# EAGLE board daGloane_panel (EAGLE 6.2), part 1 of 5
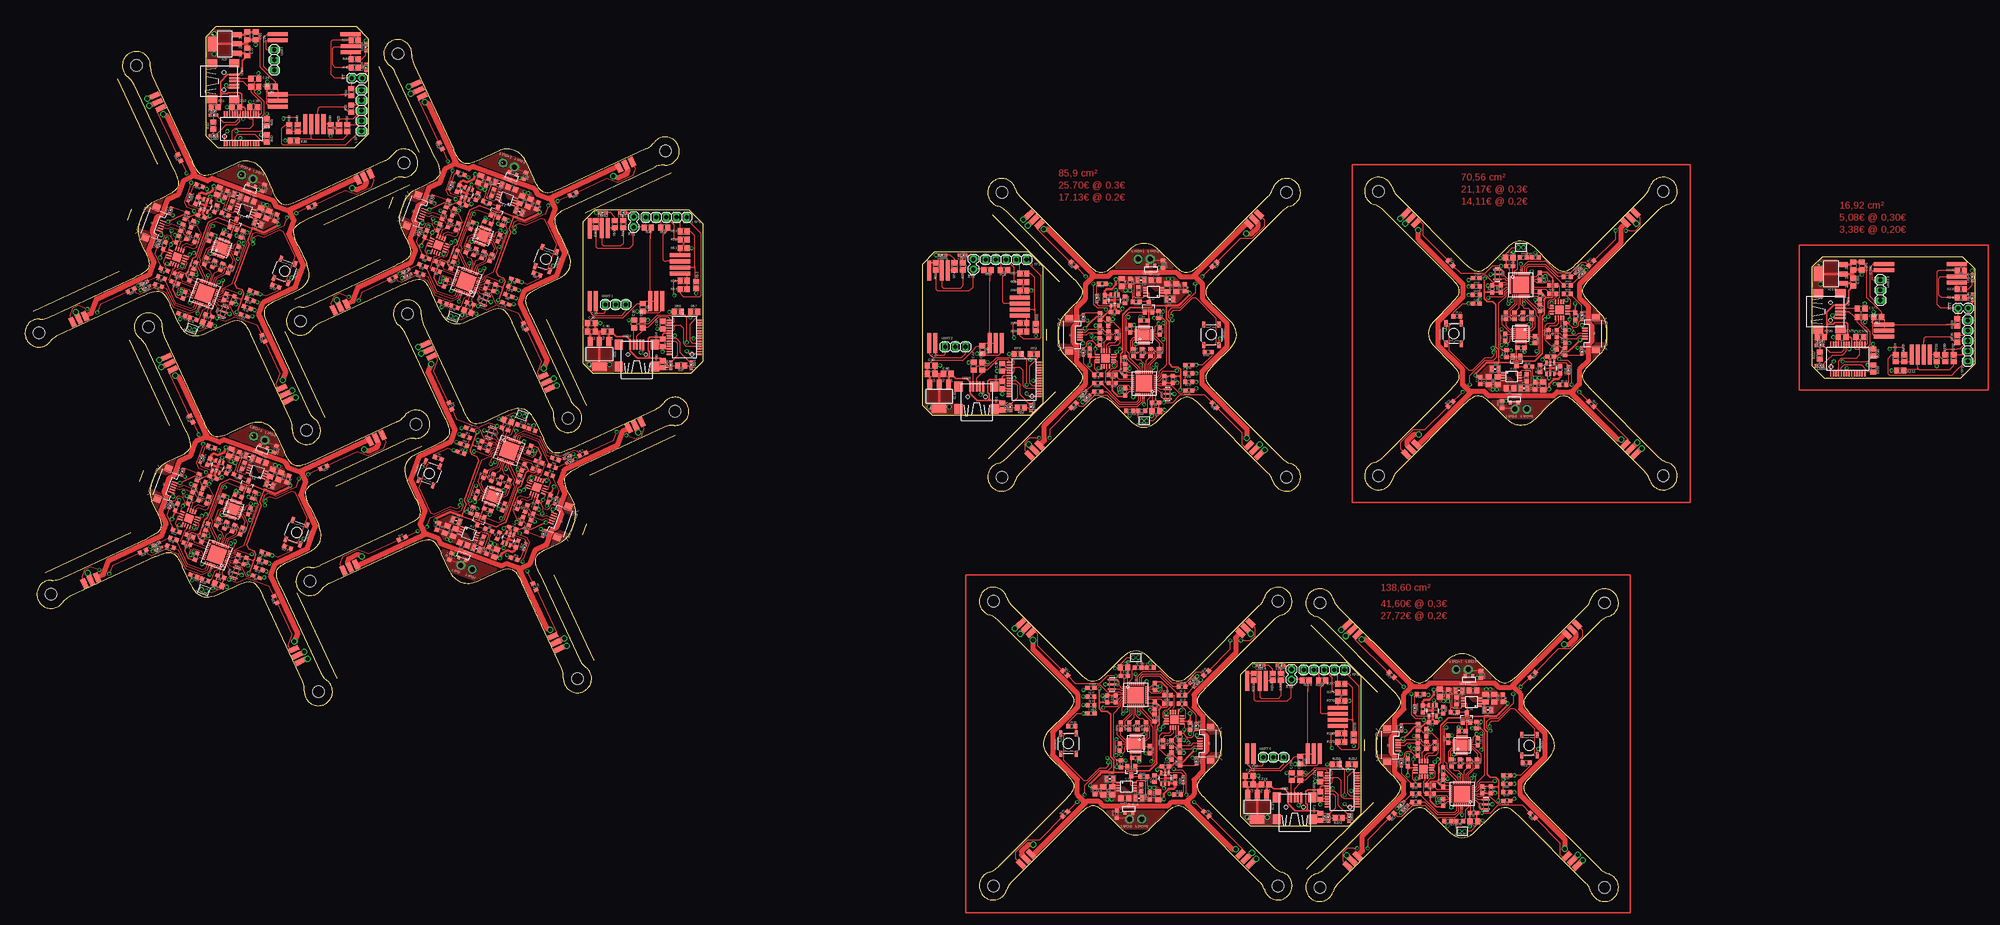
[diagram p0: board, top side]
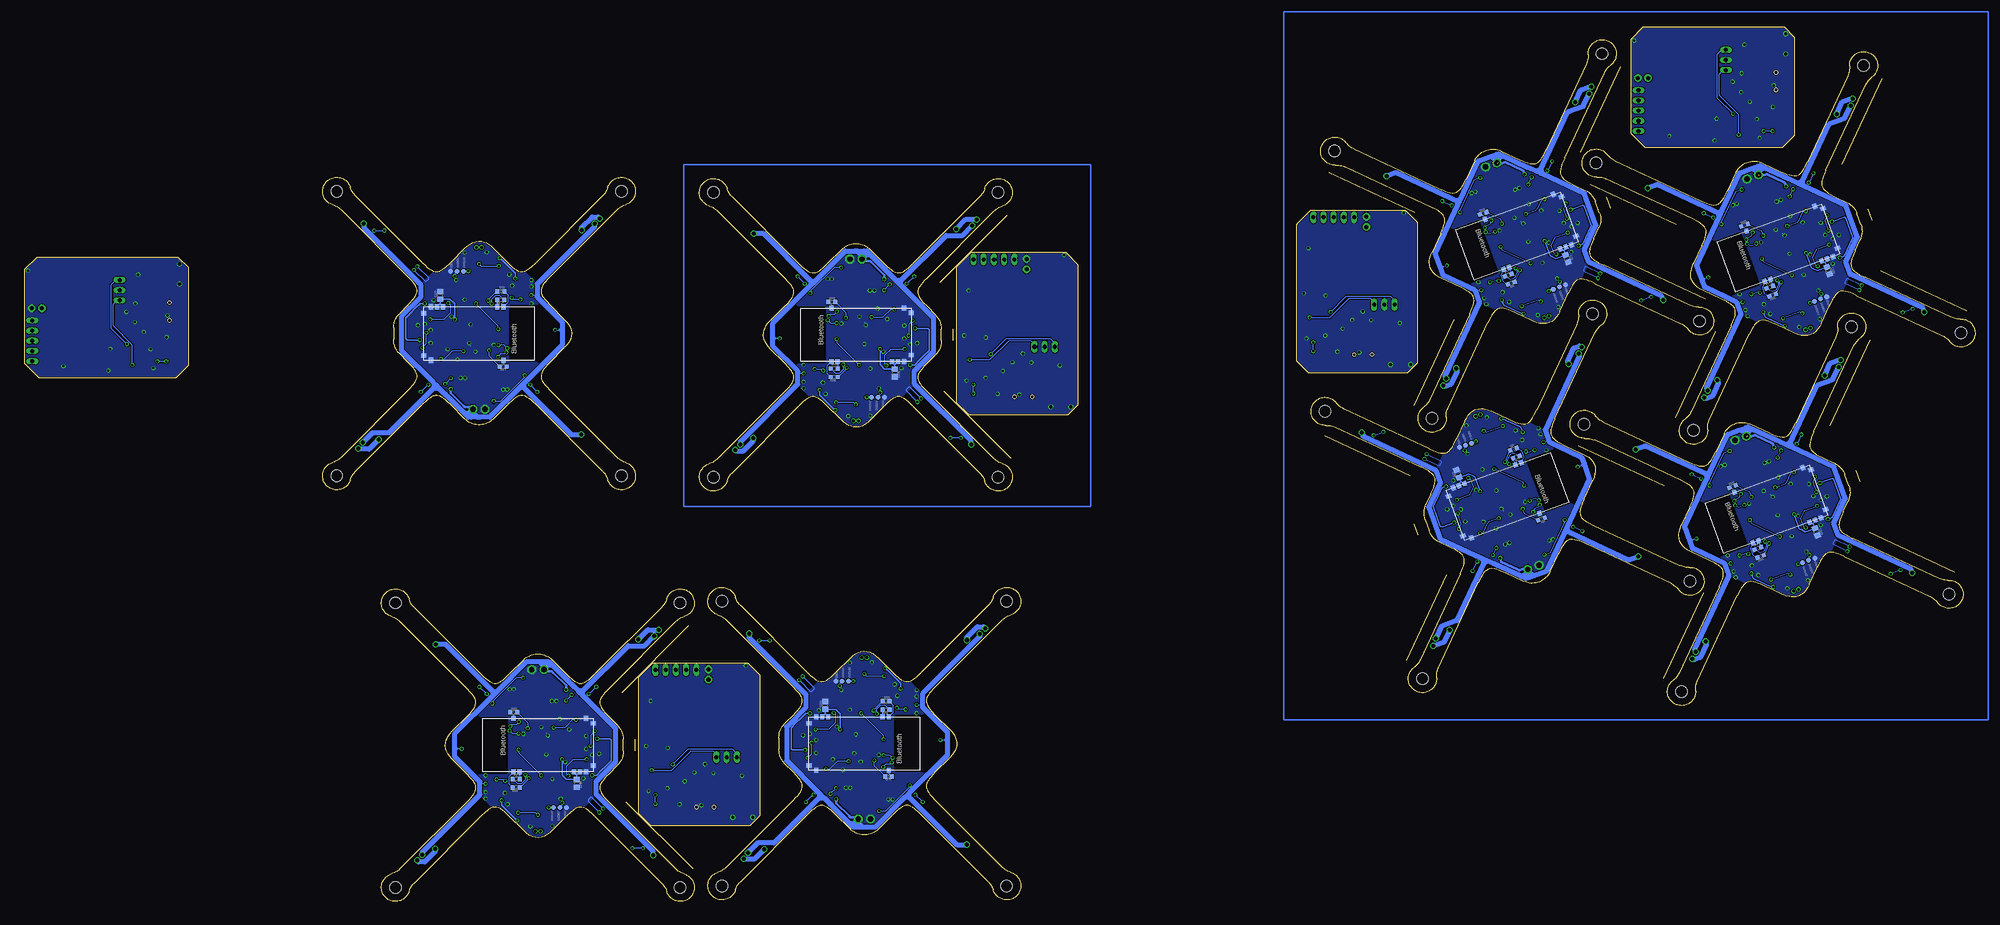
[diagram p1: board, bottom side, seen from below]

Size 484.41 x 217.35 mm. Coordinates in mm from the lower left corner, seen from the top.
Outline: 1488 segments
Copper layers (1*16): Top 0.035mm / dielectric 1.5mm / Bottom 0.035mm
Design rules: minimum track width 0.15mm, minimum drill 0.3mm, track to track 0.15mm, track to pad 0.15mm, pad to pad 0.15mm, via to via 0.15mm, smd to smd 0mil, copper to edge 0.2mm, drill to drill 0.2mm, minimum pad ring 0.2mm, minimum via ring 0.2mm, stop-mask expansion 4mil, vias tented up to drill 0.8mm, thermal gap 0.15mm
Holes 2.9 mm at 70.82,79.57 137.27,55.39 161.45,121.83 95.01,146.02 159.06,186.52 92.62,210.71 68.43,144.26 134.88,120.08 97.1,118.62 30.66,142.8 6.47,76.36 72.92,52.17 94.13,183.55 27.68,207.74 3.5,141.29 69.95,117.11 313.37,176.21 242.66,176.21 242.66,105.5 313.37,105.5 336.26,105.8 406.97,105.8 406.97,176.51 336.26,176.51 240.56,3.9 311.27,3.9 311.27,74.61 240.56,74.61 392.37,74.21 321.66,74.21 321.66,3.5 392.37,3.5
bRestrict: area 100.1,97.1 to 111.2,112; area 118.7,154.1 to 129.8,169; area 56.7,86.2 to 67.9,101.1; area 53.8,151.1 to 64.9,166; area 285.7,134.2 to 292.7,147.5; area 356.9,134.6 to 363.9,147.9; area 261.2,32.7 to 268.2,46; area 364.7,32.2 to 371.7,45.5

## Footprints (pad centres in the part's own frame; a part is rotated, then mirrored left to right if it is on the bottom)
1X02 = drill 1.016 pad 1.88: 1 0,0; 2 2.54,0
1X02_50MIL = drill 0.7 pad 1.1: 1 -0.635,0; 2 0.635,0
C0603 = smd 1.1 x 1: 1 -0.85,0; 2 0.85,0
C0805 = smd 1.3 x 1.5: 1 -0.95,0; 2 0.95,0
SOT23 = smd 1 x 1.4: 1 -0.95,-1.1; 2 0.95,-1.1; 3 0,1.1
TESTPAD_B1,27 = smd 1.27 x 1.27: PP 0,0
MSOP8 = smd 0.35 x 1: 1 -0.975,-2.05; 2 -0.325,-2.05; 3 0.325,-2.05; 4 0.975,-2.05; 5 0.975,2.05; 6 0.325,2.05; 7 -0.325,2.05; 8 -0.975,2.05
SSOP28DB = smd 0.348 x 1.397: 1 -4.225,-3.656; 2 -3.575,-3.656; 3 -2.925,-3.656; 4 -2.275,-3.656; 5 -1.625,-3.656; 6 -0.975,-3.656; 7 -0.325,-3.656; 8 0.325,-3.656; 9 0.975,-3.656; 10 1.625,-3.656; 11 2.275,-3.656; 12 2.925,-3.656; 13 3.575,-3.656; 14 4.225,-3.656; 15 4.225,3.656; 16 3.575,3.656; 17 2.925,3.656; 18 2.275,3.656; 19 1.625,3.656; 20 0.975,3.656; 21 0.325,3.656; 22 -0.325,3.656; 23 -0.975,3.656; 24 -1.625,3.656; 25 -2.275,3.656; 26 -2.925,3.656; 27 -3.575,3.656; 28 -4.225,3.656
SOT223 = smd 1.219 x 2.235: 1 -2.311,-3.099; 2 0,-3.099; 3 2.311,-3.099 | smd 3.6 x 2.2: 4 0,3.099
WUERTH-ELEKTRONIK_WE-KI_0805_B = smd 1.02 x 1.78: 1 -0.89,0; 2 0.89,0
CHIPLED_0603 = smd 0.8 x 0.8: A 0,-0.75; C 0,0.75
P1-13 = drill 1.321 pad 2.159 octagon: TP 0,0
1X05 = drill 1.016 long: 1 -5.08,0; 2 -2.54,0; 3 0,0; 4 2.54,0; 5 5.08,0
TACTILE_SWITCH_SMD = smd 1.524 x 0.762: 1 -2.54,1.905; 2 2.54,1.905; 3 -2.54,-1.905; 4 2.54,-1.905
R0603 = smd 1 x 1.1: 1 -0.85,0; 2 0.85,0
R0805 = smd 1.3 x 1.5: 1 -0.85,0; 2 0.85,0
VFQFPN36 = smd 0.75 x 0.3: 1 -2.775,2; 2 -2.775,1.5; 3 -2.775,1; 4 -2.775,0.5; 5 -2.775,0; 6 -2.775,-0.5; 7 -2.775,-1; 8 -2.775,-1.5; 9 -2.775,-2; 19 2.775,-2; 20 2.775,-1.5; 21 2.775,-1; 22 2.775,-0.5; 23 2.775,0; 24 2.775,0.5; 25 2.775,1; 26 2.775,1.5; 27 2.775,2 | smd 0.3 x 0.75: 10 -2,-2.775; 11 -1.5,-2.775; 12 -1,-2.775; 13 -0.5,-2.775; 14 0,-2.775; 15 0.5,-2.775; 16 1,-2.775; 17 1.5,-2.775; 18 2,-2.775; 28 2,2.775; 29 1.5,2.775; 30 1,2.775; 31 0.5,2.775; 32 0,2.775; 33 -0.5,2.775; 34 -1,2.775; 35 -1.5,2.775; 36 -2,2.775 | smd 4.1 x 4.1: TP 0,0
MURATA-FILTER_CSTCE__G = smd 0.4 x 2: 1 -1.2,0; 2 0,0; 3 1.2,0
SPARKFUN_SOT23-5 = smd 0.55 x 1.2: 1 -0.95,-1.3; 2 0,-1.3; 3 0.95,-1.3; 4 0.95,1.3; 5 -0.95,1.3
MPU6000 = smd 0.8 x 0.35: 1 -2,1.25; 2 -2,0.75; 3 -2,0.25; 4 -2,-0.25; 5 -2,-0.75; 6 -2,-1.25; 13 2,-1.25; 14 2,-0.75; 15 2,-0.25; 16 2,0.25; 17 2,0.75; 18 2,1.25 | smd 0.35 x 0.85: 7 -1.25,-1.925; 8 -0.75,-1.925; 9 -0.25,-1.925; 10 0.25,-1.925; 11 0.75,-1.925; 12 1.25,-1.925; 19 1.25,1.925; 20 0.75,1.925; 21 0.25,1.925; 22 -0.25,1.925; 23 -0.75,1.925; 24 -1.25,1.925 | smd 2.7 x 2.6: 25 0,0
SERIAL_QFN4X4-16 = smd 1.1 x 0.35: 1 -1.95,0.975; 2 -1.95,0.325; 3 -1.95,-0.325; 4 -1.95,-0.975; 9 1.95,-0.975; 10 1.95,-0.325; 11 1.95,0.325; 12 1.95,0.975 | smd 0.35 x 1.1: 5 -0.975,-1.95; 6 -0.325,-1.95; 7 0.325,-1.95; 8 0.975,-1.95; 13 0.975,1.95; 14 0.325,1.95; 15 -0.325,1.95; 16 -0.975,1.95 | smd 2.1 x 2.1: C 0,0
BLUETOOTH_REDUCED = smd 1.3 x 1.05: P$1 -6.65,6.04; P$2 -6.65,4.54; P$11 -6.65,-8.96; P$12 -6.65,-10.46; P$13 -6.65,-11.96; P$22 6.65,-11.96; P$34 6.65,6.04 | smd 1.05 x 1.3: P$14 -5.05,-13.75; P$21 5.45,-13.75
3A_BLDC_CONTROLLER = smd 2.45 x 1.25: 1 1.05,1.75; 2 1.05,0; 3 1.05,-1.75
MICRO3(SOT-23) = smd 0.802 x 0.972: 1 -0.95,-0.885; 2 0.95,-0.885; 3 0,0.885
SPRING_HEADER = smd 5 x 1: P$1 0,0
1X03 = drill 1.016 long: 1 -2.54,0; 2 0,0; 3 2.54,0
USB-MP-S2 = smd 2.5 x 0.5: D+ 2.487,0.005; D- 2.487,0.805; GND 2.487,-1.595; ID 2.487,-0.795; VBUS 2.487,1.605 | smd 2.5 x 2: P$1 -3.013,-4.495; P$2 -3.013,4.505; P$3 2.487,-4.395; P$4 2.487,4.505 | hole 0.9: -0.013,2.205; -0.013,-2.195
SPARKFUN-CONNECTORS_USB-MICROB = smd 0.35 x 1.4: D+ 0,2.65; D- -0.65,2.65; GND 1.3,2.65; ID 0.65,2.65; VBUS -1.3,2.65 | smd 1.8 x 1.9: MT1 -4,0; MT2 4,0

## Placement (x,y rotation side)
!AT  [1X02]  81.21,204.65 0 top
!AT1  [1X02]  151.21,167.65 90 top
!AT2  [1X02]  235.61,157.15 90 top
!AT3  [1X02]  480.21,147.45 0 top
!AT4  [1X02]  314.61,55.15 90 top
BOOTMD  [1X02_50MIL]  123.46,120.81 340 top
BOOTMD1  [1X02_50MIL]  278.01,119.45 180 top
BOOTMD2  [1X02_50MIL]  106.43,145.28 160 top
BOOTMD3  [1X02_50MIL]  44.47,77.38 160 top
BOOTMD4  [1X02_50MIL]  41.5,142.31 160 top
BOOTMD5  [1X02_50MIL]  371.61,162.55 0 top
BOOTMD6  [1X02_50MIL]  275.91,60.65 0 top
BOOTMD7  [1X02_50MIL]  357.01,17.45 180 top
C1  100nF  [C0603]  114.94,97.41 340 top
C2  10µF/6.3V  [C0805]  119.88,119.46 340 top
C3  100nF  [C0603]  123.77,107.93 250 top
C4  4.7  [C0603]  122.27,88.89 70 top
C5  100nF  [C0603]  125.41,112.44 250 top
C6  4.7µF  [C0603]  121.14,92.82 340 top
C7  100nF  [C0603]  119.25,117.45 340 top
C8  1µF  [C0603]  113.69,89.89 70 top
C9  100nF  [C0603]  110.43,117.47 340 top
C10  1µF  [C0603]  113.26,113.56 70 top
C11  10nF  [C0603]  115.23,112.84 70 top
C12  10µF/6.3V  [C0805]  108.95,88.85 160 top
C13  10µF/6.3V  [C0805]  106.68,91.69 250 top
C14  100nF  [C0603]  112.16,101.19 250 top
C15  2.2nF  [C0603]  118.91,98.1 250 top
C16  10nF  [C0603]  130.29,100.13 250 top
C17  47pF  [C0603]  123.44,94.75 250 top
C18  47pF  [C0603]  125.99,95.63 250 top
C19  100nF  [C0603]  127.05,98.54 250 top
C20  100nF  [C0603]  108.27,111.55 160 top
C21  10µF/6.3V  [C0805]  128.5,106.31 110 bottom
C22  100nF  [C0805]  52.41,197.45 0 top
C23  47pF  [C0805]  57.11,202.45 0 top
C24  47pF  [C0805]  57.11,204.55 0 top
C25  100nF  [C0805]  56.82,197.45 180 top
C26  10µ  [C0805]  55.21,215.15 270 top
C27  10µ  [C0805]  55.21,211.15 90 top
C28  100nF  [C0805]  61.21,202.45 180 top
C29  100nF  [C0805]  57.31,215.15 270 top
C30  10µF/6.3V  [C0805]  116.95,86.57 70 top
C31  10µF/6.3V  [C0805]  104.62,92.44 250 top
C32  100nF  [C0603]  114.98,87.29 250 top
C33  100nF  [C0603]  102.64,93.16 70 top
C34  100nF  [C0805]  158.41,138.85 90 top
C35  47pF  [C0805]  153.41,143.55 90 top
C36  47pF  [C0805]  151.31,143.55 90 top
C37  100nF  [C0805]  158.41,143.26 270 top
C38  10µ  [C0805]  140.71,141.65 0 top
C39  100nF  [C0805]  140.71,143.75 0 top
C40  10µ  [C0805]  144.71,141.65 180 top
C41  100nF  [C0805]  153.41,147.65 270 top
C42  100nF  [C0805]  242.81,128.35 90 top
C43  47pF  [C0805]  237.81,133.05 90 top
C44  47pF  [C0805]  235.71,133.05 90 top
C45  100nF  [C0805]  242.81,132.76 270 top
C46  10µ  [C0805]  225.11,131.15 0 top
C47  100nF  [C0805]  225.11,133.25 0 top
C48  10µ  [C0805]  229.11,131.15 180 top
C49  100nF  [C0805]  237.81,137.15 270 top
C50  100nF  [C0603]  289.11,133.35 0 top
C51  47pF  [C0603]  267.01,142.25 90 top
C52  47pF  [C0603]  269.11,143.95 90 top
C53  100nF  [C0603]  267.01,139.15 90 top
C54  10nF  [C0603]  264.51,136.55 90 top
C55  100nF  [C0603]  278.01,144.35 180 top
C56  2.2nF  [C0603]  274.51,142.35 90 top
C57  100nF  [C0603]  281.91,141.75 90 top
C58  4.7µF  [C0603]  270.61,146.55 180 top
C59  100nF  [C0603]  121.61,154.55 340 top
C60  47pF  [C0603]  103.89,170.47 70 top
C61  47pF  [C0603]  106.44,171.35 70 top
C62  100nF  [C0603]  102.83,167.56 70 top
C63  10nF  [C0603]  99.59,165.97 70 top
C64  100nF  [C0603]  114.94,168.68 160 top
C65  2.2nF  [C0603]  110.97,168 70 top
C66  100nF  [C0603]  117.72,164.9 70 top
C67  4.7µF  [C0603]  108.74,173.28 160 top
C68  4.7  [C0603]  107.62,177.2 250 top
C69  10µF/6.3V  [C0805]  123.2,174.4 70 top
C70  10µF/6.3V  [C0805]  120.94,177.25 340 top
C71  1µF  [C0603]  116.19,176.21 250 top
C72  100nF  [C0603]  119.46,148.63 160 top
C73  100nF  [C0603]  110.63,148.65 160 top
C74  100nF  [C0603]  104.47,153.66 70 top
C75  100nF  [C0603]  106.12,158.17 70 top
C76  10µF/6.3V  [C0805]  110.01,146.64 160 top
C77  10nF  [C0603]  114.65,153.25 250 top
C78  1µF  [C0603]  116.62,152.53 250 top
C79  10µF/6.3V  [C0805]  101.38,159.78 290 bottom
C80  10µF/6.3V  [C0805]  112.93,179.52 250 top
C81  10µF/6.3V  [C0805]  125.27,173.65 70 top
C82  100nF  [C0603]  114.9,178.8 70 top
C83  100nF  [C0603]  127.24,172.93 250 top
C84  100nF  [C0603]  59.65,86.64 340 top
C85  47pF  [C0603]  41.93,102.57 70 top
C86  47pF  [C0603]  44.48,103.45 70 top
C87  100nF  [C0603]  40.87,99.65 70 top
C88  10nF  [C0603]  37.63,98.06 70 top
C89  100nF  [C0603]  52.98,100.78 160 top
C90  2.2nF  [C0603]  49.01,100.09 70 top
C91  100nF  [C0603]  55.76,97 70 top
C92  4.7µF  [C0603]  46.78,105.38 160 top
C93  4.7  [C0603]  45.66,109.3 250 top
C94  10µF/6.3V  [C0805]  61.24,106.5 70 top
C95  10µF/6.3V  [C0805]  58.97,109.34 340 top
C96  1µF  [C0603]  54.23,108.3 250 top
C97  100nF  [C0603]  57.5,80.72 160 top
C98  100nF  [C0603]  48.67,80.74 160 top
C99  100nF  [C0603]  42.51,85.75 70 top
C100  100nF  [C0603]  44.15,90.26 70 top
C101  10µF/6.3V  [C0805]  48.05,78.74 160 top
C102  10nF  [C0603]  52.69,85.35 250 top
C103  1µF  [C0603]  54.66,84.63 250 top
C104  10µF/6.3V  [C0805]  39.42,91.88 290 bottom
C105  10µF/6.3V  [C0805]  50.97,111.62 250 top
C106  10µF/6.3V  [C0805]  63.31,105.75 70 top
C107  100nF  [C0603]  52.94,110.9 70 top
C108  100nF  [C0603]  65.28,105.03 250 top
C109  100nF  [C0603]  56.68,151.58 340 top
C110  47pF  [C0603]  38.96,167.5 70 top
C111  47pF  [C0603]  41.51,168.38 70 top
C112  100nF  [C0603]  37.9,164.59 70 top
C113  10nF  [C0603]  34.66,163 70 top
C114  100nF  [C0603]  50.01,165.71 160 top
C115  2.2nF  [C0603]  46.04,165.03 70 top
C116  100nF  [C0603]  52.79,161.93 70 top
C117  4.7µF  [C0603]  43.81,170.31 160 top
C118  4.7  [C0603]  42.68,174.23 250 top
C119  10µF/6.3V  [C0805]  58.27,171.43 70 top
C120  10µF/6.3V  [C0805]  56,174.28 340 top
C121  1µF  [C0603]  51.26,173.24 250 top
C122  100nF  [C0603]  54.53,145.66 160 top
C123  100nF  [C0603]  45.7,145.68 160 top
C124  100nF  [C0603]  39.54,150.68 70 top
C125  100nF  [C0603]  41.18,155.19 70 top
C126  10µF/6.3V  [C0805]  45.08,143.67 160 top
C127  10nF  [C0603]  49.72,150.28 250 top
C128  1µF  [C0603]  51.69,149.56 250 top
C129  10µF/6.3V  [C0805]  36.45,156.81 290 bottom
C130  10µF/6.3V  [C0805]  48,176.55 250 top
C131  10µF/6.3V  [C0805]  60.33,170.68 70 top
C132  100nF  [C0603]  49.97,175.83 70 top
C133  100nF  [C0603]  62.31,169.96 250 top
C134  4.7  [C0603]  268.21,149.85 270 top
C135  10µF/6.3V  [C0805]  283.81,152.55 90 top
C136  10µF/6.3V  [C0805]  280.71,154.45 0 top
C137  1µF  [C0603]  276.61,151.85 270 top
C138  100nF  [C0603]  289.11,127.05 180 top
C139  100nF  [C0603]  280.81,124.05 180 top
C140  100nF  [C0603]  273.31,126.65 90 top
C141  100nF  [C0603]  273.31,131.45 90 top
C142  10µF/6.3V  [C0805]  280.91,121.95 180 top
C143  10nF  [C0603]  283.01,129.75 270 top
C144  1µF  [C0603]  285.11,129.75 270 top
C145  10µF/6.3V  [C0805]  268.31,131.35 270 bottom
C146  10µF/6.3V  [C0805]  272.41,153.85 270 top
C147  10µF/6.3V  [C0805]  286.01,152.55 90 top
C148  100nF  [C0603]  274.51,153.85 90 top
C149  100nF  [C0603]  288.11,152.55 270 top
C150  100nF  [C0603]  360.51,148.65 180 top
C151  47pF  [C0603]  382.61,139.75 270 top
C152  47pF  [C0603]  380.51,138.05 270 top
C153  100nF  [C0603]  382.61,142.85 270 top
C154  10nF  [C0603]  385.11,145.45 270 top
C155  100nF  [C0603]  371.61,137.65 0 top
C156  2.2nF  [C0603]  375.11,139.65 270 top
C157  100nF  [C0603]  367.71,140.25 270 top
C158  4.7µF  [C0603]  379.01,135.45 0 top
C159  4.7  [C0603]  381.41,132.15 90 top
C160  10µF/6.3V  [C0805]  365.81,129.45 270 top
C161  10µF/6.3V  [C0805]  368.91,127.55 180 top
C162  1µF  [C0603]  373.01,130.15 90 top
C163  100nF  [C0603]  360.51,154.95 0 top
C164  100nF  [C0603]  368.81,157.95 0 top
C165  100nF  [C0603]  376.31,155.35 270 top
C166  100nF  [C0603]  376.31,150.55 270 top
C167  10µF/6.3V  [C0805]  368.71,160.05 0 top
C168  10nF  [C0603]  366.61,152.25 90 top
C169  1µF  [C0603]  364.51,152.25 90 top
C170  10µF/6.3V  [C0805]  381.31,150.65 90 bottom
C171  10µF/6.3V  [C0805]  377.21,128.15 90 top
C172  10µF/6.3V  [C0805]  363.61,129.45 270 top
C173  100nF  [C0603]  375.11,128.15 270 top
C174  100nF  [C0603]  361.51,129.45 90 top
C175  100nF  [C0805]  451.41,140.25 0 top
C176  47pF  [C0805]  456.11,145.25 0 top
C177  47pF  [C0805]  456.11,147.35 0 top
C178  100nF  [C0805]  455.82,140.25 180 top
C179  10µ  [C0805]  454.21,157.95 270 top
C180  100nF  [C0805]  456.31,157.95 270 top
C181  10µ  [C0805]  454.21,153.95 90 top
C182  100nF  [C0805]  460.21,145.25 180 top
C183  100nF  [C0603]  264.81,46.75 180 top
C184  47pF  [C0603]  286.91,37.85 270 top
C185  47pF  [C0603]  284.81,36.15 270 top
C186  100nF  [C0603]  286.91,40.95 270 top
C187  10nF  [C0603]  289.41,43.55 270 top
C188  100nF  [C0603]  275.91,35.75 0 top
C189  2.2nF  [C0603]  279.41,37.75 270 top
C190  100nF  [C0603]  272.01,38.35 270 top
C191  4.7µF  [C0603]  283.31,33.55 0 top
C192  4.7  [C0603]  285.71,30.25 90 top
C193  10µF/6.3V  [C0805]  270.11,27.55 270 top
C194  10µF/6.3V  [C0805]  273.21,25.65 180 top
C195  1µF  [C0603]  277.31,28.25 90 top
C196  100nF  [C0603]  264.81,53.05 0 top
C197  100nF  [C0603]  273.11,56.05 0 top
C198  100nF  [C0603]  280.61,53.45 270 top
C199  100nF  [C0603]  280.61,48.65 270 top
C200  10µF/6.3V  [C0805]  273.01,58.15 0 top
C201  10nF  [C0603]  270.91,50.35 90 top
C202  1µF  [C0603]  268.81,50.35 90 top
C203  10µF/6.3V  [C0805]  285.61,48.75 90 bottom
C204  10µF/6.3V  [C0805]  281.51,26.25 90 top
C205  10µF/6.3V  [C0805]  267.91,27.55 270 top
C206  100nF  [C0603]  279.41,26.25 270 top
C207  100nF  [C0603]  265.81,27.55 90 top
C208  100nF  [C0805]  321.81,26.35 90 top
C209  47pF  [C0805]  316.81,31.05 90 top
C210  47pF  [C0805]  314.71,31.05 90 top
C211  100nF  [C0805]  321.81,30.76 270 top
C212  10µ  [C0805]  304.11,29.15 0 top
C213  100nF  [C0805]  304.11,31.25 0 top
C214  10µ  [C0805]  308.11,29.15 180 top
C215  100nF  [C0805]  316.81,35.15 270 top
C216  100nF  [C0603]  368.11,31.35 0 top
C217  47pF  [C0603]  346.01,40.25 90 top
C218  47pF  [C0603]  348.11,41.95 90 top
C219  100nF  [C0603]  346.01,37.15 90 top
C220  10nF  [C0603]  343.51,34.55 90 top
C221  100nF  [C0603]  357.01,42.35 180 top
C222  2.2nF  [C0603]  353.51,40.35 90 top
C223  100nF  [C0603]  360.91,39.75 90 top
C224  4.7µF  [C0603]  349.61,44.55 180 top
C225  4.7  [C0603]  347.21,47.85 270 top
C226  10µF/6.3V  [C0805]  362.81,50.55 90 top
C227  10µF/6.3V  [C0805]  359.71,52.45 0 top
C228  1µF  [C0603]  355.61,49.85 270 top
C229  100nF  [C0603]  368.11,25.05 180 top
C230  100nF  [C0603]  359.81,22.05 180 top
C231  100nF  [C0603]  352.31,24.65 90 top
C232  100nF  [C0603]  352.31,29.45 90 top
C233  10µF/6.3V  [C0805]  359.91,19.95 180 top
C234  10nF  [C0603]  362.01,27.75 270 top
C235  1µF  [C0603]  364.11,27.75 270 top
C236  10µF/6.3V  [C0805]  347.31,29.35 270 bottom
C237  10µF/6.3V  [C0805]  351.41,51.85 270 top
C238  10µF/6.3V  [C0805]  365.01,50.55 90 top
C239  100nF  [C0603]  353.51,51.85 90 top
C240  100nF  [C0603]  367.11,50.55 270 top
D1  BAT54C  [SOT23]  279.11,147.65 0 top
D2  BAT54C  [SOT23]  117.11,171.41 340 top
D3  BAT54C  [SOT23]  112.78,94.69 160 top
D4  BAT54C  [SOT23]  55.15,103.5 340 top
D5  BAT54C  [SOT23]  52.17,168.43 340 top
D6  BAT54C  [SOT23]  370.51,134.35 180 top
D7  BAT54C  [SOT23]  274.81,32.45 180 top
D8  BAT54C  [SOT23]  358.11,45.65 0 top
GND  TESTPAD_TPB1,27  [TESTPAD_B1,27]  128.11,112.84 20 bottom
GND1  TESTPAD_TPB1,27  [TESTPAD_B1,27]  270.91,125.35 180 bottom
GND2  TESTPAD_TPB1,27  [TESTPAD_B1,27]  101.77,153.25 200 bottom
GND3  TESTPAD_TPB1,27  [TESTPAD_B1,27]  39.81,85.35 200 bottom
GND4  TESTPAD_TPB1,27  [TESTPAD_B1,27]  36.84,150.28 200 bottom
GND5  TESTPAD_TPB1,27  [TESTPAD_B1,27]  378.71,156.65 0 bottom
GND6  TESTPAD_TPB1,27  [TESTPAD_B1,27]  283.01,54.75 0 bottom
GND7  TESTPAD_TPB1,27  [TESTPAD_B1,27]  349.91,23.35 180 bottom
IC1  MCP1252-33X50  [MSOP8]  110.32,91.44 250 top
IC2  FT232RL  [SSOP28DB]  163.81,140.25 90 top
IC3  FT232RL  [SSOP28DB]  53.81,192.05 0 top
IC4  MCP1252-33X50  [MSOP8]  119.57,174.66 70 top
IC5  UA78M05DCY  [SOT223]  49.61,213.15 90 top
IC6  MCP1252-33X50  [MSOP8]  57.61,106.76 70 top
IC7  MCP1252-33X50  [MSOP8]  54.64,171.69 70 top
IC8  UA78M05DCY  [SOT223]  142.71,136.05 180 top
IC9  FT232RL  [SSOP28DB]  248.21,129.75 90 top
IC10  UA78M05DCY  [SOT223]  227.11,125.55 180 top
IC11  MCP1252-33X50  [MSOP8]  280.31,151.55 90 top
IC12  MCP1252-33X50  [MSOP8]  369.31,130.45 270 top
IC13  FT232RL  [SSOP28DB]  452.81,134.85 0 top
IC14  UA78M05DCY  [SOT223]  448.61,155.95 90 top
IC15  MCP1252-33X50  [MSOP8]  273.61,28.55 270 top
IC16  FT232RL  [SSOP28DB]  327.21,27.75 90 top
IC17  UA78M05DCY  [SOT223]  306.11,23.55 180 top
IC18  MCP1252-33X50  [MSOP8]  359.31,49.55 90 top
L1  [WUERTH-ELEKTRONIK_WE-KI_0805_B]  107.11,94.62 340 top
L2  [WUERTH-ELEKTRONIK_WE-KI_0805_B]  112.24,87.65 340 top
L3  [WUERTH-ELEKTRONIK_WE-KI_0805_B]  284.41,149.65 180 top
L4  [WUERTH-ELEKTRONIK_WE-KI_0805_B]  277.21,154.45 180 top
L5  [WUERTH-ELEKTRONIK_WE-KI_0805_B]  122.77,171.47 160 top
L6  [WUERTH-ELEKTRONIK_WE-KI_0805_B]  117.65,178.44 160 top
L7  [WUERTH-ELEKTRONIK_WE-KI_0805_B]  60.81,103.57 160 top
L8  [WUERTH-ELEKTRONIK_WE-KI_0805_B]  55.69,110.54 160 top
L9  [WUERTH-ELEKTRONIK_WE-KI_0805_B]  57.84,168.5 160 top
L10  [WUERTH-ELEKTRONIK_WE-KI_0805_B]  52.71,175.47 160 top
L11  [WUERTH-ELEKTRONIK_WE-KI_0805_B]  365.21,132.35 0 top
L12  [WUERTH-ELEKTRONIK_WE-KI_0805_B]  372.41,127.55 0 top
L13  [WUERTH-ELEKTRONIK_WE-KI_0805_B]  269.51,30.45 0 top
L14  [WUERTH-ELEKTRONIK_WE-KI_0805_B]  276.71,25.65 0 top
L15  [WUERTH-ELEKTRONIK_WE-KI_0805_B]  363.41,47.65 180 top
L16  [WUERTH-ELEKTRONIK_WE-KI_0805_B]  356.21,52.45 180 top
LED1  [CHIPLED_0603]  131.8,99.58 340 top
LED2  [CHIPLED_0603]  128.86,91.5 160 top
LED3  [CHIPLED_0603]  134.74,110.5 295 top
LED4  [CHIPLED_0603]  135.3,109.3 295 top
LED5  [CHIPLED_0603]  124.15,88.21 160 top
LED6  [CHIPLED_0603]  46.81,195.45 270 top
LED7  [CHIPLED_0603]  46.81,190.35 270 top
LED8  [CHIPLED_0603]  84.71,212.25 0 top
LED9  [CHIPLED_0603]  84.71,207.35 180 top
LED10  [CHIPLED_0603]  160.41,133.25 0 top
LED11  [CHIPLED_0603]  165.51,133.25 0 top
LED12  [CHIPLED_0603]  143.61,171.15 90 top
LED13  [CHIPLED_0603]  148.51,171.15 270 top
LED14  [CHIPLED_0603]  244.81,122.75 0 top
LED15  [CHIPLED_0603]  95.14,155.59 115 top
LED16  [CHIPLED_0603]  94.58,156.8 115 top
LED17  [CHIPLED_0603]  98.09,166.52 160 top
LED18  [CHIPLED_0603]  101.03,174.6 340 top
LED19  [CHIPLED_0603]  105.74,177.88 340 top
LED20  [CHIPLED_0603]  33.18,87.69 115 top
LED21  [CHIPLED_0603]  32.62,88.9 115 top
LED22  [CHIPLED_0603]  36.13,98.61 160 top
LED23  [CHIPLED_0603]  39.07,106.69 340 top
LED24  [CHIPLED_0603]  43.78,109.98 340 top
LED25  [CHIPLED_0603]  30.21,152.62 115 top
LED26  [CHIPLED_0603]  29.65,153.83 115 top
LED27  [CHIPLED_0603]  33.15,163.54 160 top
LED28  [CHIPLED_0603]  36.1,171.63 340 top
LED29  [CHIPLED_0603]  40.8,174.91 340 top
LED30  [CHIPLED_0603]  249.91,122.75 0 top
LED31  [CHIPLED_0603]  228.01,160.65 90 top
LED32  [CHIPLED_0603]  232.91,160.65 270 top
LED33  [CHIPLED_0603]  263.88,125.28 135 top
LED34  [CHIPLED_0603]  262.94,126.22 135 top
LED35  [CHIPLED_0603]  262.91,136.55 180 top
LED36  [CHIPLED_0603]  262.91,145.15 0 top
LED37  [CHIPLED_0603]  266.21,149.85 0 top
LED38  [CHIPLED_0603]  385.74,156.72 315 top
LED39  [CHIPLED_0603]  386.68,155.78 315 top
LED40  [CHIPLED_0603]  386.71,145.45 0 top
LED41  [CHIPLED_0603]  386.71,136.85 180 top
LED42  [CHIPLED_0603]  383.41,132.15 180 top
LED43  [CHIPLED_0603]  445.81,138.25 270 top
LED44  [CHIPLED_0603]  445.81,133.15 270 top
LED45  [CHIPLED_0603]  483.71,155.05 0 top
LED46  [CHIPLED_0603]  483.71,150.15 180 top
LED47  [CHIPLED_0603]  290.04,54.82 315 top
LED48  [CHIPLED_0603]  290.98,53.88 315 top
LED49  [CHIPLED_0603]  291.01,43.55 0 top
LED50  [CHIPLED_0603]  291.01,34.95 180 top
LED51  [CHIPLED_0603]  287.71,30.25 180 top
LED52  [CHIPLED_0603]  323.81,20.75 0 top
LED53  [CHIPLED_0603]  328.91,20.75 0 top
LED54  [CHIPLED_0603]  307.01,58.65 90 top
LED55  [CHIPLED_0603]  311.91,58.65 270 top
LED56  [CHIPLED_0603]  342.88,23.28 135 top
LED57  [CHIPLED_0603]  341.94,24.22 135 top
LED58  [CHIPLED_0603]  341.91,34.55 180 top
LED59  [CHIPLED_0603]  341.91,43.15 0 top
LED60  [CHIPLED_0603]  345.21,47.85 0 top
LIPO+  TPSPAD1-13  [P1-13]  111.12,82.52 160 top
LIPO+1  TPSPAD1-13  [P1-13]  276.51,159.65 0 top
LIPO+2  TPSPAD1-13  [P1-13]  118.77,183.57 340 top
LIPO+3  TPSPAD1-13  [P1-13]  56.81,115.67 340 top
LIPO+4  TPSPAD1-13  [P1-13]  53.84,180.6 340 top
LIPO+5  TPSPAD1-13  [P1-13]  373.11,122.35 180 top
LIPO+6  TPSPAD1-13  [P1-13]  277.41,20.45 180 top
LIPO+7  TPSPAD1-13  [P1-13]  355.51,57.65 0 top
LIPO-  TPSPAD1-13  [P1-13]  108.3,83.55 160 top
LIPO-1  TPSPAD1-13  [P1-13]  279.51,159.65 0 top
LIPO-2  TPSPAD1-13  [P1-13]  121.59,182.54 340 top
LIPO-3  TPSPAD1-13  [P1-13]  59.63,114.64 340 top
LIPO-4  TPSPAD1-13  [P1-13]  56.65,179.57 340 top
LIPO-5  TPSPAD1-13  [P1-13]  370.11,122.35 180 top
LIPO-6  TPSPAD1-13  [P1-13]  274.41,20.45 180 top
LIPO-7  TPSPAD1-13  [P1-13]  358.51,57.65 0 top
LTP  [1X05]  83.61,196.55 270 top
LTP1  [1X05]  159.31,170.05 0 top
LTP2  [1X05]  243.71,159.55 0 top
LTP3  [1X05]  482.61,139.35 270 top
LTP4  [1X05]  322.71,57.55 0 top
ON/OFF  SWITCH-MOMENTARY-2SMD  [TACTILE_SWITCH_SMD]  100.44,106.41 250 top
ON/OFF1  SWITCH-MOMENTARY-2SMD  [TACTILE_SWITCH_SMD]  294.71,140.85 90 top
ON/OFF2  SWITCH-MOMENTARY-2SMD  [TACTILE_SWITCH_SMD]  129.44,159.68 70 top
ON/OFF3  SWITCH-MOMENTARY-2SMD  [TACTILE_SWITCH_SMD]  67.48,91.78 70 top
ON/OFF4  SWITCH-MOMENTARY-2SMD  [TACTILE_SWITCH_SMD]  64.51,156.71 70 top
ON/OFF5  SWITCH-MOMENTARY-2SMD  [TACTILE_SWITCH_SMD]  354.91,141.15 270 top
ON/OFF6  SWITCH-MOMENTARY-2SMD  [TACTILE_SWITCH_SMD]  259.21,39.25 270 top
ON/OFF7  SWITCH-MOMENTARY-2SMD  [TACTILE_SWITCH_SMD]  373.71,38.85 90 top
R1  150R  [R0603]  120.08,103.95 250 top
R2  2k  [R0603]  117.58,90.92 250 top
R3  150R  [R0603]  116.14,105.39 250 top
R4  150R  [R0603]  118.11,104.67 250 top
R5  150R  [R0603]  114.16,106.1 250 top
R6  10k  [R0603]  111.04,97.24 70 top
R7  10k  [R0603]  102.67,110.18 340 top
R8  10k  [R0603]  115.21,92.31 160 top
R9  1k  [R0603]  127.66,109.28 160 top
R10  1k  [R0603]  126.95,107.3 160 top
R11  27R  [R0603]  124.5,97.66 70 top
R12  1k  [R0603]  108.99,113.52 160 top
R13  27R  [R0603]  122.53,98.38 70 top
R14  150R  [R0603]  130.33,106.07 340 top
R15  150R  [R0603]  131.77,110.02 160 top
R16  150R  [R0603]  131.05,108.05 160 top
R17  10k  [R0603]  123.16,118.26 340 top
R18  10k  [R0603]  93.71,90.24 205 top
R19  150R  [R0603]  124.93,92.71 250 top
R20  10k  [R0603]  125.98,117.23 160 top
R21  3k3  [R0603]  109.71,115.49 340 top
R22  1k  [R0603]  114.65,112.42 20 bottom
R23  1k  [R0603]  113.93,110.44 200 bottom
R24  10k  [R0603]  105.7,85.77 70 top
R25  10k  [R0603]  138.57,111.16 25 top
R26  10k  [R0603]  105.68,123.13 115 top
R27  10k  [R0603]  126.6,78.27 295 top
R28  10k  [R0603]  122.74,105.11 250 top
R29  330  [R0603]  121.57,85.21 160 top
R30  1k  [R0603]  107.69,95.05 200 bottom
R31  150R  [R0805]  47.11,197.45 0 top
R32  150R  [R0805]  46.81,192.85 90 top
R33  4k7  [R0805]  81.91,214.05 180 top
R34  4k7  [R0805]  81.01,201.15 270 top
R35  1k6  [R0805]  78.01,192.25 90 top
R36  3k  [R0805]  75.91,192.25 90 top
R37  1k6  [R0805]  80.11,192.25 90 top
R38  3k  [R0805]  66.81,189.15 0 top
R39  1k6  [R0805]  65.71,192.25 90 top
R40  3k  [R0805]  67.81,192.25 270 top
R41  100  [R0805]  81.01,197.05 90 top
R42  4k7  [R0805]  60.11,189.65 270 top
R43  4k7  [R0805]  60.11,193.65 270 top
R44  470R  [R0805]  81.91,209.35 180 top
R45  470R  [R0805]  81.91,207.25 180 top
R46  150R  [R0805]  158.41,133.55 90 top
R47  150R  [R0805]  163.01,133.25 180 top
R48  4k7  [R0805]  141.81,168.35 270 top
R49  4k7  [R0805]  154.71,167.45 0 top
R50  1k6  [R0805]  163.61,164.45 180 top
R51  3k  [R0805]  163.61,162.35 180 top
R52  1k6  [R0805]  163.61,166.55 180 top
R53  3k  [R0805]  166.71,153.25 90 top
R54  1k6  [R0805]  163.61,152.15 180 top
R55  3k  [R0805]  163.61,154.25 0 top
R56  100  [R0805]  158.81,167.45 180 top
R57  4k7  [R0805]  166.21,146.55 0 top
R58  4k7  [R0805]  162.21,146.55 0 top
R59  470R  [R0805]  146.51,168.35 270 top
R60  470R  [R0805]  148.61,168.35 270 top
R61  150R  [R0805]  242.81,123.05 90 top
R62  150R  [R0805]  247.41,122.75 180 top
R63  4k7  [R0805]  226.21,157.85 270 top
R64  4k7  [R0805]  239.11,156.95 0 top
R65  1k6  [R0805]  248.01,153.95 180 top
R66  3k  [R0805]  248.01,151.85 180 top
R67  1k6  [R0805]  248.01,156.05 180 top
R68  3k  [R0805]  251.11,142.75 90 top
R69  1k6  [R0805]  248.01,141.65 180 top
R70  3k  [R0805]  248.01,143.75 0 top
R71  100  [R0805]  243.21,156.95 180 top
R72  4k7  [R0805]  250.61,136.05 0 top
R73  4k7  [R0805]  246.61,136.05 0 top
R74  470R  [R0805]  230.91,157.85 270 top
R75  470R  [R0805]  233.01,157.85 270 top
R76  150R  [R0603]  98.84,158.05 340 top
R77  10k  [R0603]  103.9,148.86 340 top
R78  10k  [R0603]  106.72,147.84 160 top
R79  1k  [R0603]  120.89,152.57 340 top
R80  3k3  [R0603]  120.18,150.6 160 top
R81  150R  [R0603]  98.12,156.08 340 top
R82  150R  [R0603]  99.55,160.02 160 top
R83  150R  [R0603]  104.95,173.38 70 top
R84  27R  [R0603]  105.38,168.44 250 top
R85  27R  [R0603]  107.36,167.72 250 top
R86  150R  [R0603]  109.8,162.15 70 top
R87  150R  [R0603]  113.75,160.71 70 top
R88  150R  [R0603]  111.77,161.43 70 top
R89  150R  [R0603]  115.72,159.99 70 top
R90  1k  [R0603]  102.22,156.82 340 top
R91  1k  [R0603]  102.94,158.79 340 top
R92  2k  [R0603]  112.31,175.17 70 top
R93  10k  [R0603]  127.22,155.91 160 top
R94  10k  [R0603]  118.84,168.86 250 top
R95  10k  [R0603]  114.67,173.78 340 top
R96  1k  [R0603]  115.23,153.68 200 bottom
R97  1k  [R0603]  115.95,155.65 20 bottom
R98  10k  [R0603]  124.18,180.32 250 top
R99  330  [R0603]  108.32,180.88 340 top
R100  10k  [R0603]  136.18,175.85 25 top
R101  10k  [R0603]  91.32,154.93 205 top
R102  10k  [R0603]  124.21,142.96 295 top
R103  10k  [R0603]  103.29,187.82 115 top
R104  10k  [R0603]  107.14,160.99 70 top
R105  1k  [R0603]  122.19,171.04 20 bottom
R106  150R  [R0603]  36.88,90.15 340 top
R107  10k  [R0603]  41.94,80.96 340 top
R108  10k  [R0603]  44.76,79.93 160 top
R109  1k  [R0603]  58.93,84.67 340 top
R110  3k3  [R0603]  58.21,82.7 160 top
R111  150R  [R0603]  36.16,88.17 340 top
R112  150R  [R0603]  37.59,92.12 160 top
R113  150R  [R0603]  42.99,105.48 70 top
R114  27R  [R0603]  43.42,100.53 250 top
R115  27R  [R0603]  45.4,99.81 250 top
R116  150R  [R0603]  47.84,94.24 70 top
R117  150R  [R0603]  51.78,92.81 70 top
R118  150R  [R0603]  49.81,93.52 70 top
R119  150R  [R0603]  53.76,92.09 70 top
R120  1k  [R0603]  40.26,88.91 340 top
R121  1k  [R0603]  40.98,90.89 340 top
R122  2k  [R0603]  50.35,107.27 70 top
R123  10k  [R0603]  65.26,88.01 160 top
R124  10k  [R0603]  56.88,100.96 250 top
R125  10k  [R0603]  52.71,105.88 340 top
R126  1k  [R0603]  53.27,85.77 200 bottom
R127  1k  [R0603]  53.99,87.75 20 bottom
R128  10k  [R0603]  62.22,112.42 250 top
R129  330  [R0603]  46.36,112.98 340 top
R130  10k  [R0603]  74.22,107.95 25 top
R131  10k  [R0603]  29.36,87.03 205 top
R132  10k  [R0603]  62.25,75.06 295 top
R133  10k  [R0603]  41.33,119.92 115 top
R134  10k  [R0603]  45.18,93.08 70 top
R135  1k  [R0603]  60.23,103.14 20 bottom
R136  150R  [R0603]  33.9,155.08 340 top
R137  10k  [R0603]  38.97,145.89 340 top
R138  10k  [R0603]  41.79,144.87 160 top
R139  1k  [R0603]  55.96,149.6 340 top
R140  3k3  [R0603]  55.24,147.63 160 top
R141  150R  [R0603]  33.19,153.1 340 top
R142  150R  [R0603]  34.62,157.05 160 top
R143  150R  [R0603]  40.02,170.41 70 top
R144  27R  [R0603]  40.45,165.46 250 top
R145  27R  [R0603]  42.43,164.75 250 top
R146  150R  [R0603]  44.87,159.18 70 top
R147  150R  [R0603]  48.81,157.74 70 top
R148  150R  [R0603]  46.84,158.46 70 top
R149  150R  [R0603]  50.79,157.02 70 top
R150  1k  [R0603]  37.29,153.85 340 top
R151  1k  [R0603]  38.01,155.82 340 top
R152  2k  [R0603]  47.37,172.2 70 top
R153  10k  [R0603]  62.29,152.94 160 top
R154  10k  [R0603]  53.91,165.89 250 top
R155  10k  [R0603]  49.74,170.81 340 top
R156  1k  [R0603]  50.3,150.71 200 bottom
R157  1k  [R0603]  51.02,152.68 20 bottom
R158  10k  [R0603]  59.25,177.35 250 top
R159  330  [R0603]  43.39,177.91 340 top
R160  10k  [R0603]  71.24,172.88 25 top
R161  10k  [R0603]  26.38,151.96 205 top
R162  10k  [R0603]  59.27,139.99 295 top
R163  10k  [R0603]  38.36,184.85 115 top
R164  10k  [R0603]  42.21,158.01 70 top
R165  1k  [R0603]  57.26,168.07 20 bottom
R166  150R  [R0603]  266.51,128.85 0 top
R167  10k  [R0603]  274.41,121.95 0 top
R168  10k  [R0603]  277.41,121.95 180 top
R169  1k  [R0603]  289.11,131.25 0 top
R170  3k3  [R0603]  289.11,129.15 180 top
R171  150R  [R0603]  266.51,126.75 0 top
R172  150R  [R0603]  266.51,130.95 180 top
R173  150R  [R0603]  267.01,145.35 90 top
R174  27R  [R0603]  269.11,140.85 270 top
R175  27R  [R0603]  271.21,140.85 270 top
R176  150R  [R0603]  275.41,136.45 90 top
R177  150R  [R0603]  279.61,136.45 90 top
R178  150R  [R0603]  277.51,136.45 90 top
R179  150R  [R0603]  281.71,136.45 90 top
R180  1k  [R0603]  270.11,128.85 0 top
R181  1k  [R0603]  270.11,130.95 0 top
R182  2k  [R0603]  273.31,149.55 90 top
R183  10k  [R0603]  293.91,136.55 180 top
R184  10k  [R0603]  281.61,145.85 270 top
R185  10k  [R0603]  276.01,149.05 0 top
R186  1k  [R0603]  283.41,130.35 180 bottom
R187  1k  [R0603]  283.41,132.45 0 bottom
R188  10k  [R0603]  282.71,158.45 270 top
R189  330  [R0603]  267.61,153.55 0 top
R190  10k  [R0603]  295.51,158.35 45 top
R191  10k  [R0603]  260.51,123.35 225 top
R192  10k  [R0603]  295.51,123.35 315 top
R193  10k  [R0603]  260.51,158.35 135 top
R194  10k  [R0603]  273.31,134.45 90 top
R195  1k  [R0603]  284.01,149.05 0 bottom
R196  150R  [R0603]  383.11,153.15 180 top
R197  10k  [R0603]  375.21,160.05 180 top
R198  10k  [R0603]  372.21,160.05 0 top
R199  1k  [R0603]  360.51,150.75 180 top
R200  3k3  [R0603]  360.51,152.85 0 top
R201  150R  [R0603]  383.11,155.25 180 top
R202  150R  [R0603]  383.11,151.05 0 top
R203  150R  [R0603]  382.61,136.65 270 top
R204  27R  [R0603]  380.51,141.15 90 top
R205  27R  [R0603]  378.41,141.15 90 top
R206  150R  [R0603]  374.21,145.55 270 top
R207  150R  [R0603]  370.01,145.55 270 top
R208  150R  [R0603]  372.11,145.55 270 top
R209  150R  [R0603]  367.91,145.55 270 top
R210  1k  [R0603]  379.51,153.15 180 top
R211  1k  [R0603]  379.51,151.05 180 top
R212  2k  [R0603]  376.31,132.45 270 top
R213  10k  [R0603]  355.71,145.45 0 top
R214  10k  [R0603]  368.01,136.15 90 top
R215  10k  [R0603]  373.61,132.95 180 top
R216  1k  [R0603]  366.21,151.65 0 bottom
R217  1k  [R0603]  366.21,149.55 180 bottom
R218  10k  [R0603]  366.91,123.55 90 top
R219  330  [R0603]  382.01,128.45 180 top
R220  10k  [R0603]  354.11,123.65 225 top
R221  10k  [R0603]  389.11,158.65 45 top
R222  10k  [R0603]  354.11,158.65 135 top
R223  10k  [R0603]  389.11,123.65 315 top
R224  10k  [R0603]  376.31,147.55 270 top
R225  1k  [R0603]  365.61,132.95 180 bottom
R226  150R  [R0805]  446.11,140.25 0 top
R227  150R  [R0805]  445.81,135.65 90 top
R228  4k7  [R0805]  480.91,156.85 180 top
R229  4k7  [R0805]  480.01,143.95 270 top
R230  1k6  [R0805]  477.01,135.05 90 top
R231  3k  [R0805]  474.91,135.05 90 top
R232  1k6  [R0805]  479.11,135.05 90 top
R233  3k  [R0805]  465.81,131.95 0 top
R234  1k6  [R0805]  464.71,135.05 90 top
R235  3k  [R0805]  466.81,135.05 270 top
R236  100  [R0805]  480.01,139.85 90 top
R237  4k7  [R0805]  459.11,132.45 270 top
R238  4k7  [R0805]  459.11,136.45 270 top
R239  470R  [R0805]  480.91,152.15 180 top
R240  470R  [R0805]  480.91,150.05 180 top
R241  150R  [R0603]  287.41,51.25 180 top
R242  10k  [R0603]  279.51,58.15 180 top
R243  10k  [R0603]  276.51,58.15 0 top
R244  1k  [R0603]  264.81,48.85 180 top
R245  3k3  [R0603]  264.81,50.95 0 top
R246  150R  [R0603]  287.41,53.35 180 top
R247  150R  [R0603]  287.41,49.15 0 top
R248  150R  [R0603]  286.91,34.75 270 top
R249  27R  [R0603]  284.81,39.25 90 top
R250  27R  [R0603]  282.71,39.25 90 top
R251  150R  [R0603]  278.51,43.65 270 top
R252  150R  [R0603]  274.31,43.65 270 top
R253  150R  [R0603]  276.41,43.65 270 top
R254  150R  [R0603]  272.21,43.65 270 top
R255  1k  [R0603]  283.81,51.25 180 top
R256  1k  [R0603]  283.81,49.15 180 top
R257  2k  [R0603]  280.61,30.55 270 top
R258  10k  [R0603]  260.01,43.55 0 top
R259  10k  [R0603]  272.31,34.25 90 top
R260  10k  [R0603]  277.91,31.05 180 top
R261  1k  [R0603]  270.51,49.75 0 bottom
R262  1k  [R0603]  270.51,47.65 180 bottom
R263  10k  [R0603]  271.21,21.65 90 top
R264  330  [R0603]  286.31,26.55 180 top
R265  10k  [R0603]  258.41,21.75 225 top
R266  10k  [R0603]  293.41,56.75 45 top
R267  10k  [R0603]  258.41,56.75 135 top
R268  10k  [R0603]  293.41,21.75 315 top
R269  10k  [R0603]  280.61,45.65 270 top
R270  1k  [R0603]  269.91,31.05 180 bottom
R271  150R  [R0805]  321.81,21.05 90 top
R272  150R  [R0805]  326.41,20.75 180 top
R273  4k7  [R0805]  305.21,55.85 270 top
R274  4k7  [R0805]  318.11,54.95 0 top
R275  1k6  [R0805]  327.01,51.95 180 top
R276  3k  [R0805]  327.01,49.85 180 top
R277  1k6  [R0805]  327.01,54.05 180 top
R278  3k  [R0805]  330.11,40.75 90 top
R279  1k6  [R0805]  327.01,39.65 180 top
R280  3k  [R0805]  327.01,41.75 0 top
R281  100  [R0805]  322.21,54.95 180 top
R282  4k7  [R0805]  329.61,34.05 0 top
R283  4k7  [R0805]  325.61,34.05 0 top
R284  470R  [R0805]  309.91,55.85 270 top
R285  470R  [R0805]  312.01,55.85 270 top
R286  150R  [R0603]  345.51,26.85 0 top
R287  10k  [R0603]  353.41,19.95 0 top
R288  10k  [R0603]  356.41,19.95 180 top
R289  1k  [R0603]  368.11,29.25 0 top
R290  3k3  [R0603]  368.11,27.15 180 top
R291  150R  [R0603]  345.51,24.75 0 top
R292  150R  [R0603]  345.51,28.95 180 top
R293  150R  [R0603]  346.01,43.35 90 top
R294  27R  [R0603]  348.11,38.85 270 top
R295  27R  [R0603]  350.21,38.85 270 top
R296  150R  [R0603]  354.41,34.45 90 top
R297  150R  [R0603]  358.61,34.45 90 top
R298  150R  [R0603]  356.51,34.45 90 top
R299  150R  [R0603]  360.71,34.45 90 top
R300  1k  [R0603]  349.11,26.85 0 top
R301  1k  [R0603]  349.11,28.95 0 top
R302  2k  [R0603]  352.31,47.55 90 top
R303  10k  [R0603]  372.91,34.55 180 top
R304  10k  [R0603]  360.61,43.85 270 top
R305  10k  [R0603]  355.01,47.05 0 top
R306  1k  [R0603]  362.41,28.35 180 bottom
R307  1k  [R0603]  362.41,30.45 0 bottom
R308  10k  [R0603]  361.71,56.45 270 top
R309  330  [R0603]  346.61,51.55 0 top
R310  10k  [R0603]  374.51,56.35 45 top
R311  10k  [R0603]  339.51,21.35 225 top
R312  10k  [R0603]  374.51,21.35 315 top
R313  10k  [R0603]  339.51,56.35 135 top
R314  10k  [R0603]  352.31,32.45 90 top
R315  1k  [R0603]  363.01,47.05 0 bottom
SWCLK  TESTPAD_TPB1,27  [TESTPAD_B1,27]  125.1,113.93 20 bottom
SWCLK1  TESTPAD_TPB1,27  [TESTPAD_B1,27]  274.11,125.35 180 bottom
SWCLK2  TESTPAD_TPB1,27  [TESTPAD_B1,27]  104.78,152.16 200 bottom
SWCLK3  TESTPAD_TPB1,27  [TESTPAD_B1,27]  42.82,84.26 200 bottom
SWCLK4  TESTPAD_TPB1,27  [TESTPAD_B1,27]  39.85,149.19 200 bottom
SWCLK5  TESTPAD_TPB1,27  [TESTPAD_B1,27]  375.51,156.65 0 bottom
SWCLK6  TESTPAD_TPB1,27  [TESTPAD_B1,27]  279.81,54.75 0 bottom
SWCLK7  TESTPAD_TPB1,27  [TESTPAD_B1,27]  353.11,23.35 180 bottom
SWDIO  TESTPAD_TPB1,27  [TESTPAD_B1,27]  126.61,113.39 20 bottom
SWDIO1  TESTPAD_TPB1,27  [TESTPAD_B1,27]  272.51,125.35 180 bottom
SWDIO2  TESTPAD_TPB1,27  [TESTPAD_B1,27]  103.28,152.71 200 bottom
SWDIO3  TESTPAD_TPB1,27  [TESTPAD_B1,27]  41.32,84.8 200 bottom
SWDIO4  TESTPAD_TPB1,27  [TESTPAD_B1,27]  38.35,149.74 200 bottom
SWDIO5  TESTPAD_TPB1,27  [TESTPAD_B1,27]  377.11,156.65 0 bottom
SWDIO6  TESTPAD_TPB1,27  [TESTPAD_B1,27]  281.41,54.75 0 bottom
SWDIO7  TESTPAD_TPB1,27  [TESTPAD_B1,27]  351.51,23.35 180 bottom
U1  STM32F10XTXU6  [VFQFPN36]  120.27,112.07 340 top
U2  STM32F10XTXU6  [VFQFPN36]  278.01,128.75 180 top
U3  STM32F10XTXU6  [VFQFPN36]  109.61,154.02 160 top
U4  STM32F10XTXU6  [VFQFPN36]  47.65,86.12 160 top
U5  STM32F10XTXU6  [VFQFPN36]  44.68,151.05 160 top
U6  STM32F10XTXU6  [VFQFPN36]  371.61,153.25 0 top
U7  STM32F10XTXU6  [VFQFPN36]  275.91,51.35 0 top
U8  STM32F10XTXU6  [VFQFPN36]  357.01,26.75 180 top
U$1  MURATA-FILTER_CSTCE__G  [MURATA-FILTER_CSTCE__G]  115.62,116.53 70 top
U$2  SPARKFUN_MCP73831  [SPARKFUN_SOT23-5]  120.05,90.13 340 top
U$3  MPU6000  [MPU6000]  116.14,100.7 250 top
U$4  SERIAL_FT230XQ  [SERIAL_QFN4X4-16]  127.18,102.96 340 top
U$5  BLUETOOTH_REDUCED  [BLUETOOTH_REDUCED]  116.14,100.7 290 bottom
U$6  3A_BLDC_CONTROLLER  [3A_BLDC_CONTROLLER]  80.25,83.97 295 top
U$7  3A_BLDC_CONTROLLER  [3A_BLDC_CONTROLLER]  132.87,64.82 205 top
U$8  3A_BLDC_CONTROLLER  [3A_BLDC_CONTROLLER]  152.02,117.44 115 top
U$9  3A_BLDC_CONTROLLER  [3A_BLDC_CONTROLLER]  99.4,136.59 25 top
U$10  IRLM6344TRPBF  [MICRO3(SOT-23)]  108.96,85.97 340 top
U$11  [DAGLOANE_LOGO]  106.74,104.12 70 top
U$12  SPRING_HEADER  [SPRING_HEADER]  62.81,215.58 0 top
U$13  SPRING_HEADER  [SPRING_HEADER]  62.81,214.08 0 top
U$14  SPRING_HEADER  [SPRING_HEADER]  62.81,199.08 0 top
U$15  SPRING_HEADER  [SPRING_HEADER]  62.81,197.58 0 top
U$16  SPRING_HEADER  [SPRING_HEADER]  72.66,193.15 90 top
U$17  SPRING_HEADER  [SPRING_HEADER]  69.66,193.15 90 top
U$18  SPRING_HEADER  [SPRING_HEADER]  62.81,200.58 0 top
U$19  SPRING_HEADER  [SPRING_HEADER]  71.16,193.15 90 top
U$20  SPRING_HEADER  [SPRING_HEADER]  74.16,193.15 90 top
U$21  SPRING_HEADER  [SPRING_HEADER]  80.86,215.58 0 top
U$22  SPRING_HEADER  [SPRING_HEADER]  80.91,212.55 0 top
U$23  SPRING_HEADER  [SPRING_HEADER]  80.91,211.05 0 top
U$24  SPRING_HEADER  [SPRING_HEADER]  140.28,149.25 90 top
U$25  SPRING_HEADER  [SPRING_HEADER]  141.78,149.25 90 top
U$26  SPRING_HEADER  [SPRING_HEADER]  156.78,149.25 90 top
U$27  SPRING_HEADER  [SPRING_HEADER]  158.28,149.25 90 top
U$28  SPRING_HEADER  [SPRING_HEADER]  162.71,159.1 180 top
U$29  SPRING_HEADER  [SPRING_HEADER]  162.71,156.1 180 top
U$30  SPRING_HEADER  [SPRING_HEADER]  155.28,149.25 90 top
U$31  SPRING_HEADER  [SPRING_HEADER]  162.71,157.6 180 top
U$32  SPRING_HEADER  [SPRING_HEADER]  162.71,160.6 180 top
U$33  SPRING_HEADER  [SPRING_HEADER]  140.28,167.3 90 top
U$34  SPRING_HEADER  [SPRING_HEADER]  143.31,167.35 90 top
U$35  MPU6000  [MPU6000]  113.75,165.39 70 top
U$36  SERIAL_FT230XQ  [SERIAL_QFN4X4-16]  102.71,163.13 160 top
U$37  SPARKFUN_MCP73831  [SPARKFUN_SOT23-5]  109.83,175.97 160 top
U$38  MURATA-FILTER_CSTCE__G  [MURATA-FILTER_CSTCE__G]  114.26,149.56 250 top
U$39  IRLM6344TRPBF  [MICRO3(SOT-23)]  120.92,180.13 160 top
U$40  BLUETOOTH_REDUCED  [BLUETOOTH_REDUCED]  113.75,165.39 110 bottom
U$41  3A_BLDC_CONTROLLER  [3A_BLDC_CONTROLLER]  149.63,182.13 115 top
U$42  3A_BLDC_CONTROLLER  [3A_BLDC_CONTROLLER]  97.01,201.28 25 top
U$43  3A_BLDC_CONTROLLER  [3A_BLDC_CONTROLLER]  77.86,148.66 295 top
U$44  3A_BLDC_CONTROLLER  [3A_BLDC_CONTROLLER]  130.48,129.5 205 top
U$45  [DAGLOANE_LOGO]  123.14,161.97 250 top
U$46  MPU6000  [MPU6000]  51.79,97.49 70 top
U$47  SERIAL_FT230XQ  [SERIAL_QFN4X4-16]  40.75,95.23 160 top
U$48  SPARKFUN_MCP73831  [SPARKFUN_SOT23-5]  47.87,108.07 160 top
U$49  MURATA-FILTER_CSTCE__G  [MURATA-FILTER_CSTCE__G]  52.3,81.66 250 top
U$50  IRLM6344TRPBF  [MICRO3(SOT-23)]  58.96,112.22 160 top
U$51  BLUETOOTH_REDUCED  [BLUETOOTH_REDUCED]  51.79,97.49 110 bottom
U$52  3A_BLDC_CONTROLLER  [3A_BLDC_CONTROLLER]  87.67,114.22 115 top
U$53  3A_BLDC_CONTROLLER  [3A_BLDC_CONTROLLER]  35.05,133.38 25 top
U$54  3A_BLDC_CONTROLLER  [3A_BLDC_CONTROLLER]  15.9,80.75 295 top
U$55  3A_BLDC_CONTROLLER  [3A_BLDC_CONTROLLER]  68.52,61.6 205 top
U$56  [DAGLOANE_LOGO]  61.18,94.07 250 top
U$57  MPU6000  [MPU6000]  48.81,162.42 70 top
U$58  SERIAL_FT230XQ  [SERIAL_QFN4X4-16]  37.78,160.16 160 top
U$59  SPARKFUN_MCP73831  [SPARKFUN_SOT23-5]  44.9,173 160 top
U$60  MURATA-FILTER_CSTCE__G  [MURATA-FILTER_CSTCE__G]  49.33,146.59 250 top
U$61  IRLM6344TRPBF  [MICRO3(SOT-23)]  55.99,177.16 160 top
U$62  BLUETOOTH_REDUCED  [BLUETOOTH_REDUCED]  48.81,162.42 110 bottom
U$63  3A_BLDC_CONTROLLER  [3A_BLDC_CONTROLLER]  84.7,179.16 115 top
U$64  3A_BLDC_CONTROLLER  [3A_BLDC_CONTROLLER]  32.08,198.31 25 top
U$65  3A_BLDC_CONTROLLER  [3A_BLDC_CONTROLLER]  12.93,145.69 295 top
U$66  3A_BLDC_CONTROLLER  [3A_BLDC_CONTROLLER]  65.55,126.53 205 top
U$67  [DAGLOANE_LOGO]  58.21,159 250 top
U$68  SPRING_HEADER  [SPRING_HEADER]  144.81,167.35 90 top
U$69  SPRING_HEADER  [SPRING_HEADER]  224.68,138.75 90 top
U$70  SPRING_HEADER  [SPRING_HEADER]  226.18,138.75 90 top
U$71  SPRING_HEADER  [SPRING_HEADER]  241.18,138.75 90 top
U$72  SPRING_HEADER  [SPRING_HEADER]  242.68,138.75 90 top
U$73  SPRING_HEADER  [SPRING_HEADER]  247.11,148.6 180 top
U$74  SPRING_HEADER  [SPRING_HEADER]  247.11,145.6 180 top
U$75  SPRING_HEADER  [SPRING_HEADER]  239.68,138.75 90 top
U$76  SPRING_HEADER  [SPRING_HEADER]  247.11,147.1 180 top
U$77  SPRING_HEADER  [SPRING_HEADER]  247.11,150.1 180 top
U$78  SPRING_HEADER  [SPRING_HEADER]  224.68,156.8 90 top
U$79  SPRING_HEADER  [SPRING_HEADER]  227.71,156.85 90 top
U$80  SPRING_HEADER  [SPRING_HEADER]  229.21,156.85 90 top
U$81  MPU6000  [MPU6000]  278.01,140.85 90 top
U$82  SERIAL_FT230XQ  [SERIAL_QFN4X4-16]  268.41,134.95 180 top
U$83  SPARKFUN_MCP73831  [SPARKFUN_SOT23-5]  270.71,149.45 180 top
U$84  MURATA-FILTER_CSTCE__G  [MURATA-FILTER_CSTCE__G]  283.91,126.15 270 top
U$85  IRLM6344TRPBF  [MICRO3(SOT-23)]  279.71,157.15 180 top
U$86  BLUETOOTH_REDUCED  [BLUETOOTH_REDUCED]  278.01,140.85 90 bottom
U$87  3A_BLDC_CONTROLLER  [3A_BLDC_CONTROLLER]  306.01,168.85 135 top
U$88  3A_BLDC_CONTROLLER  [3A_BLDC_CONTROLLER]  250.01,168.85 45 top
U$89  3A_BLDC_CONTROLLER  [3A_BLDC_CONTROLLER]  250.01,112.85 315 top
U$90  3A_BLDC_CONTROLLER  [3A_BLDC_CONTROLLER]  306.01,112.85 225 top
U$91  [DAGLOANE_LOGO]  288.01,140.85 270 top
U$92  MPU6000  [MPU6000]  371.61,141.15 270 top
U$93  SERIAL_FT230XQ  [SERIAL_QFN4X4-16]  381.21,147.05 0 top
U$94  SPARKFUN_MCP73831  [SPARKFUN_SOT23-5]  378.91,132.55 0 top
U$95  MURATA-FILTER_CSTCE__G  [MURATA-FILTER_CSTCE__G]  365.71,155.85 90 top
U$96  IRLM6344TRPBF  [MICRO3(SOT-23)]  369.91,124.85 0 top
U$97  BLUETOOTH_REDUCED  [BLUETOOTH_REDUCED]  371.61,141.15 270 bottom
U$98  3A_BLDC_CONTROLLER  [3A_BLDC_CONTROLLER]  343.61,113.15 315 top
U$99  3A_BLDC_CONTROLLER  [3A_BLDC_CONTROLLER]  399.61,113.15 225 top
U$100  3A_BLDC_CONTROLLER  [3A_BLDC_CONTROLLER]  399.61,169.15 135 top
U$101  3A_BLDC_CONTROLLER  [3A_BLDC_CONTROLLER]  343.61,169.15 45 top
U$102  [DAGLOANE_LOGO]  361.61,141.15 90 top
U$103  SPRING_HEADER  [SPRING_HEADER]  461.81,158.38 0 top
U$104  SPRING_HEADER  [SPRING_HEADER]  461.81,156.88 0 top
U$105  SPRING_HEADER  [SPRING_HEADER]  461.81,141.88 0 top
U$106  SPRING_HEADER  [SPRING_HEADER]  461.81,140.38 0 top
U$107  SPRING_HEADER  [SPRING_HEADER]  471.66,135.95 90 top
U$108  SPRING_HEADER  [SPRING_HEADER]  468.66,135.95 90 top
U$109  SPRING_HEADER  [SPRING_HEADER]  461.81,143.38 0 top
U$110  SPRING_HEADER  [SPRING_HEADER]  470.16,135.95 90 top
U$111  SPRING_HEADER  [SPRING_HEADER]  473.16,135.95 90 top
U$112  SPRING_HEADER  [SPRING_HEADER]  479.86,158.38 0 top
U$113  SPRING_HEADER  [SPRING_HEADER]  479.91,155.35 0 top
U$114  SPRING_HEADER  [SPRING_HEADER]  479.91,153.85 0 top
U$115  MPU6000  [MPU6000]  275.91,39.25 270 top
U$116  SERIAL_FT230XQ  [SERIAL_QFN4X4-16]  285.51,45.15 0 top
U$117  SPARKFUN_MCP73831  [SPARKFUN_SOT23-5]  283.21,30.65 0 top
U$118  MURATA-FILTER_CSTCE__G  [MURATA-FILTER_CSTCE__G]  270.01,53.95 90 top
U$119  IRLM6344TRPBF  [MICRO3(SOT-23)]  274.21,22.95 0 top
U$120  BLUETOOTH_REDUCED  [BLUETOOTH_REDUCED]  275.91,39.25 270 bottom
U$121  3A_BLDC_CONTROLLER  [3A_BLDC_CONTROLLER]  247.91,11.25 315 top
U$122  3A_BLDC_CONTROLLER  [3A_BLDC_CONTROLLER]  303.91,11.25 225 top
U$123  3A_BLDC_CONTROLLER  [3A_BLDC_CONTROLLER]  303.91,67.25 135 top
U$124  3A_BLDC_CONTROLLER  [3A_BLDC_CONTROLLER]  247.91,67.25 45 top
U$125  [DAGLOANE_LOGO]  265.91,39.25 90 top
U$126  SPRING_HEADER  [SPRING_HEADER]  303.68,36.75 90 top
U$127  SPRING_HEADER  [SPRING_HEADER]  305.18,36.75 90 top
U$128  SPRING_HEADER  [SPRING_HEADER]  320.18,36.75 90 top
U$129  SPRING_HEADER  [SPRING_HEADER]  321.68,36.75 90 top
U$130  SPRING_HEADER  [SPRING_HEADER]  326.11,46.6 180 top
U$131  SPRING_HEADER  [SPRING_HEADER]  326.11,43.6 180 top
U$132  SPRING_HEADER  [SPRING_HEADER]  318.68,36.75 90 top
U$133  SPRING_HEADER  [SPRING_HEADER]  326.11,45.1 180 top
U$134  SPRING_HEADER  [SPRING_HEADER]  326.11,48.1 180 top
U$135  SPRING_HEADER  [SPRING_HEADER]  303.68,54.8 90 top
U$136  SPRING_HEADER  [SPRING_HEADER]  306.71,54.85 90 top
U$137  SPRING_HEADER  [SPRING_HEADER]  308.21,54.85 90 top
U$138  MPU6000  [MPU6000]  357.01,38.85 90 top
U$139  SERIAL_FT230XQ  [SERIAL_QFN4X4-16]  347.41,32.95 180 top
U$140  SPARKFUN_MCP73831  [SPARKFUN_SOT23-5]  349.71,47.45 180 top
U$141  MURATA-FILTER_CSTCE__G  [MURATA-FILTER_CSTCE__G]  362.91,24.15 270 top
U$142  IRLM6344TRPBF  [MICRO3(SOT-23)]  358.71,55.15 180 top
U$143  BLUETOOTH_REDUCED  [BLUETOOTH_REDUCED]  357.01,38.85 90 bottom
U$144  3A_BLDC_CONTROLLER  [3A_BLDC_CONTROLLER]  385.01,66.85 135 top
U$145  3A_BLDC_CONTROLLER  [3A_BLDC_CONTROLLER]  329.01,66.85 45 top
U$146  3A_BLDC_CONTROLLER  [3A_BLDC_CONTROLLER]  329.01,10.85 315 top
U$147  3A_BLDC_CONTROLLER  [3A_BLDC_CONTROLLER]  385.01,10.85 225 top
U$148  [DAGLOANE_LOGO]  367.01,38.85 270 top
UART  [1X03]  61.91,209.15 270 top
UART1  [1X03]  146.71,148.35 0 top
UART2  [1X03]  231.11,137.85 0 top
UART3  [1X03]  460.91,151.95 270 top
UART4  [1X03]  310.11,35.85 0 top
USB1  USB-MB-S2  [USB-MP-S2]  49.51,203.85 0 top
USB2  USB-MB-S2  [USB-MP-S2]  152.01,135.95 90 top
USB3  USB-MB-S2  [USB-MP-S2]  236.41,125.45 90 top
USB4  USB-MB-S2  [USB-MP-S2]  448.51,146.65 0 top
USB5  USB-MB-S2  [USB-MP-S2]  315.41,23.45 90 top
X1  USB_MICROB_PLUG_MT  [SPARKFUN-CONNECTORS_USB-MICROB]  259.41,140.85 270 top
X2  USB_MICROB_PLUG_MT  [SPARKFUN-CONNECTORS_USB-MICROB]  133.61,94.34 70 top
X3  USB_MICROB_PLUG_MT  [SPARKFUN-CONNECTORS_USB-MICROB]  96.27,171.75 250 top
X4  USB_MICROB_PLUG_MT  [SPARKFUN-CONNECTORS_USB-MICROB]  34.31,103.85 250 top
X5  USB_MICROB_PLUG_MT  [SPARKFUN-CONNECTORS_USB-MICROB]  31.34,168.78 250 top
X6  USB_MICROB_PLUG_MT  [SPARKFUN-CONNECTORS_USB-MICROB]  390.21,141.15 90 top
X7  USB_MICROB_PLUG_MT  [SPARKFUN-CONNECTORS_USB-MICROB]  294.51,39.25 90 top
X8  USB_MICROB_PLUG_MT  [SPARKFUN-CONNECTORS_USB-MICROB]  338.41,38.85 270 top

## Library data of the parts
!AT !AT1-!AT4 BOOTMD BOOTMD1-BOOTMD7 GND GND1-GND7 IC1 IC4 IC6 IC7 IC11 IC12 IC15 IC18 L1-L16 ON/OFF ON/OFF1-ON/OFF7 SWCLK SWCLK1-SWCLK7 SWDIO SWDIO1-SWDIO7 U1-U8 U$1-U$148 X1-X8 = daGloane
C1-C14 C16-C55 C57-C64 C66-C89 C91-C114 C116-C155 C157-C188 C190-C221 C223-C240 R1-R315 = rcl
C15 C56 C65 C90 C115 C156 C189 C222 = rcl; VOLTAGE: 50V
D1-D8 = diode
IC2 IC3 IC9 IC13 IC16 = ftdichip
IC5 IC8 IC10 IC14 IC17 = linear; LM1117: LM1117
LED1-LED60 = led
LIPO+ LIPO+1-LIPO+7 LIPO- LIPO-1-LIPO-7 = testpad
LTP LTP1-LTP4 UART UART1-UART4 = pinhead
USB1-USB5 = con-usb